# Altium PCB OBCComms.PcbDoc
Units mil, origin at the board's own origin, x right, y up, seen from the top; angles counter-clockwise.
Board outline 3625 x 3400 mil, 2 copper layers (Component Side, Bottom Layer), stack 65.756 mil thick; 25 components, 28 nets, 205 pads, 13 vias.
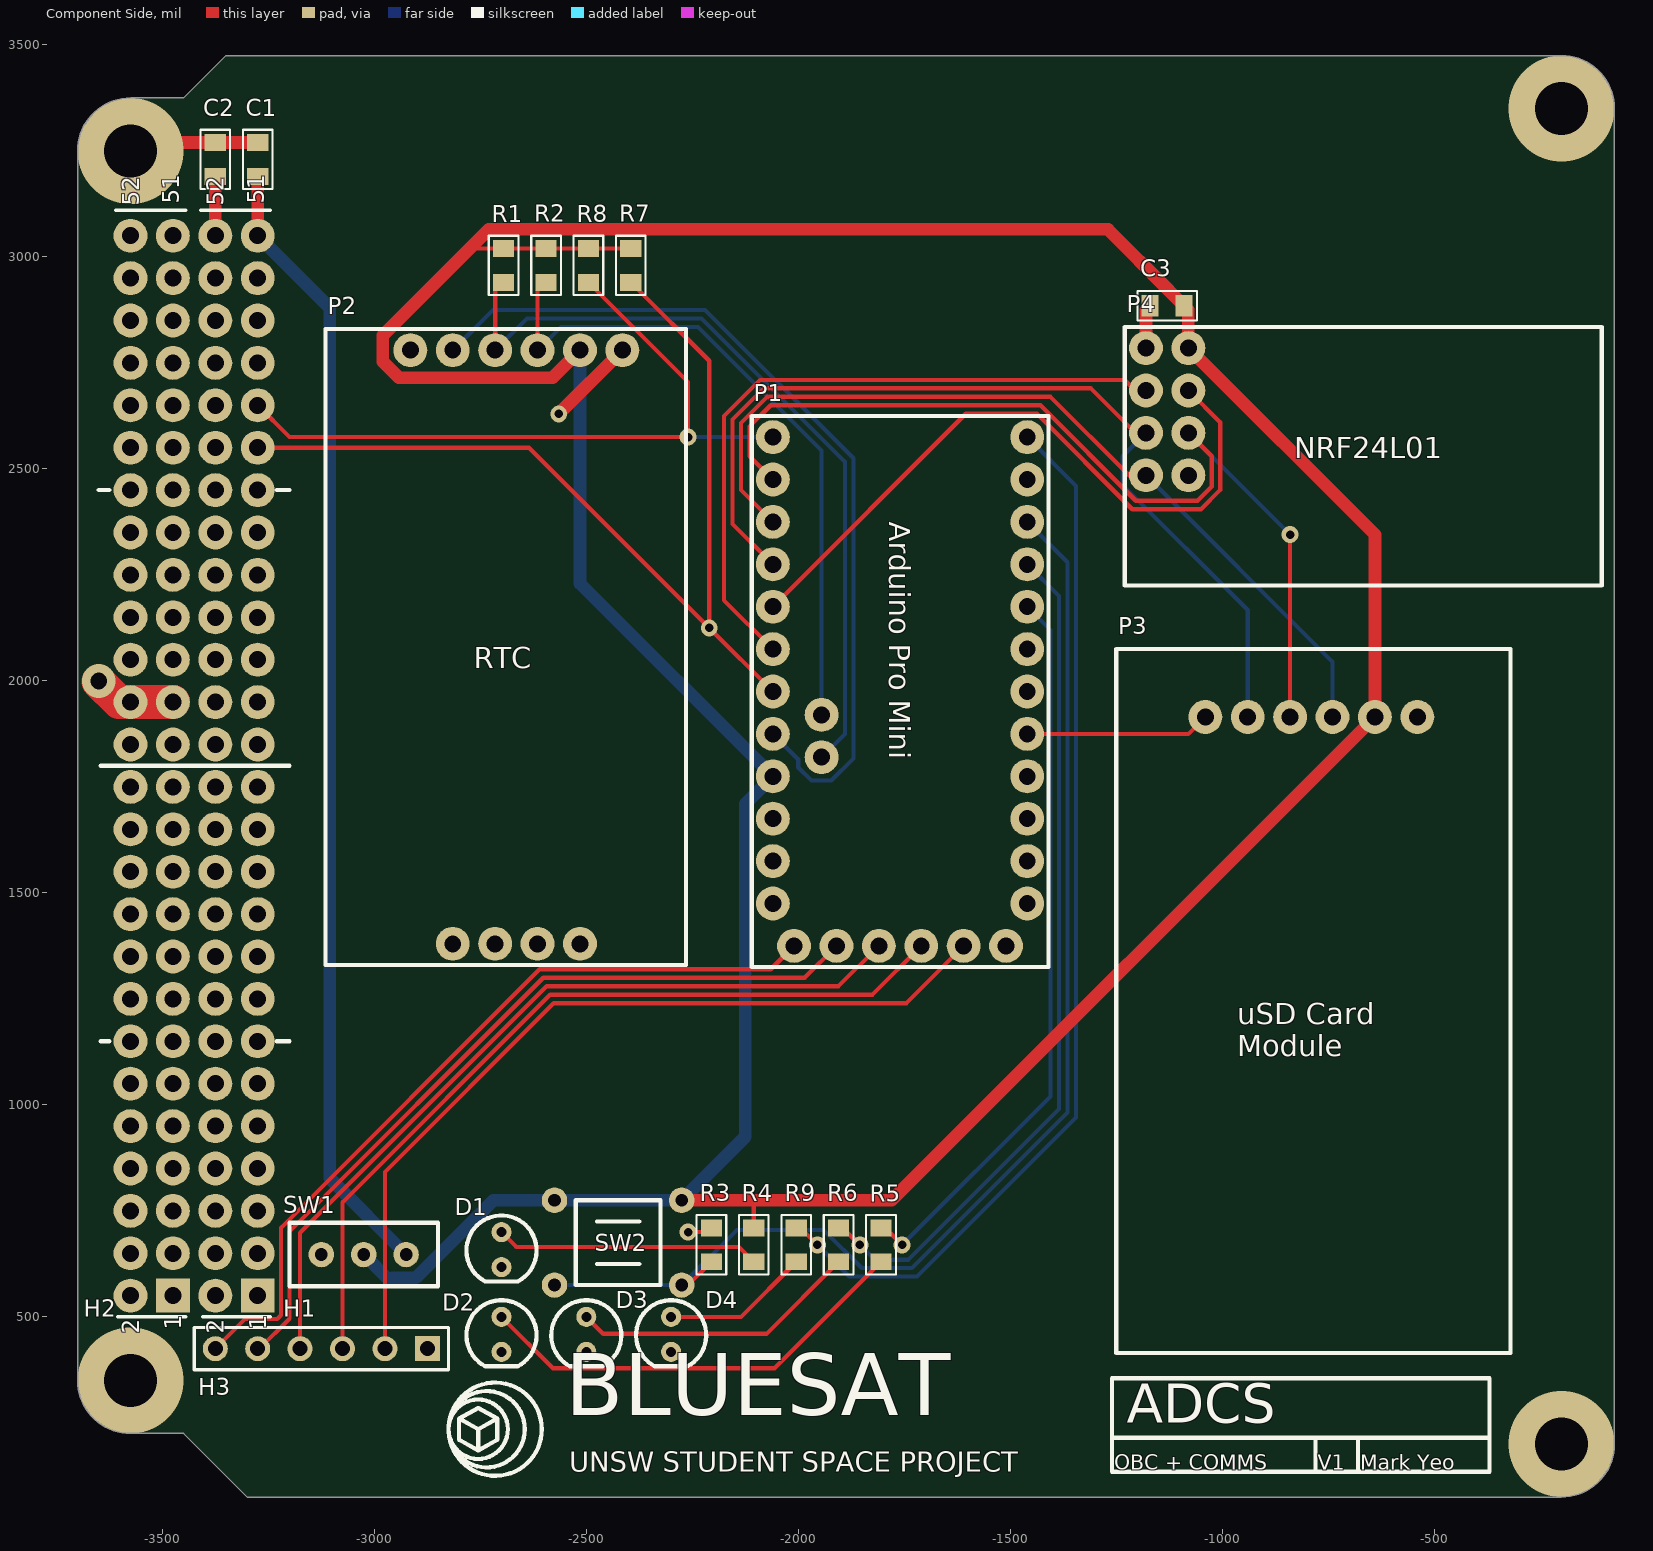
[diagram p0: Component Side view]
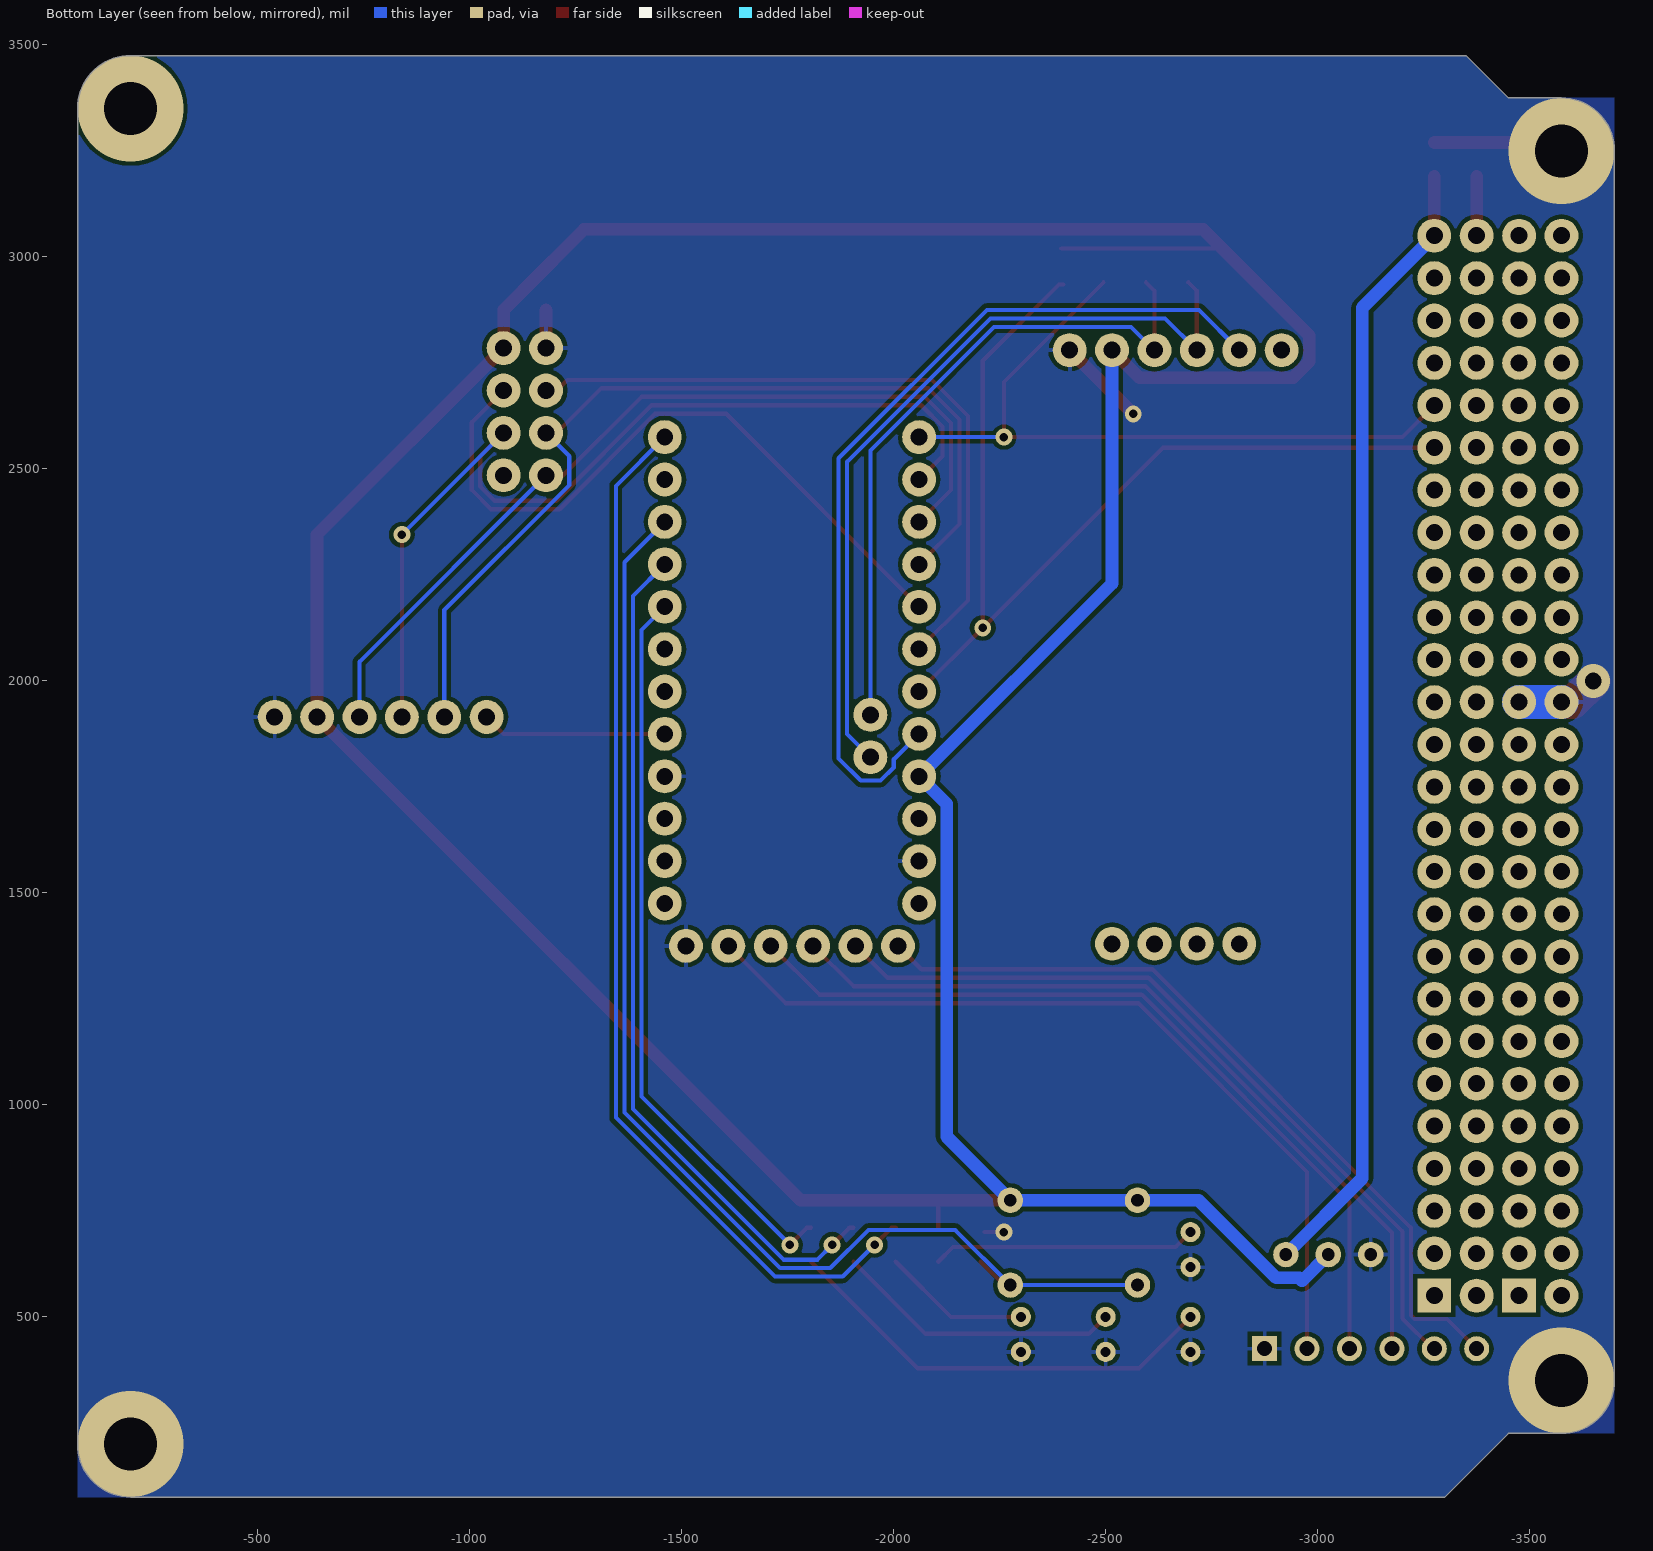
[diagram p1: Bottom Layer view, seen from below]

## Layer stack, top to bottom
Top Solder: solder mask 0.394, Solder Resist, Dk 3.5
Component Side: signal copper 1.378
Dielectric 1: core 63, FR-4, Dk 4.2
Bottom Layer: signal copper 1.378
Solder Side: solder mask 0.394, Solder Resist, Dk 3.5

## Board outline
-3575,225 cw(c-3575,350) -3700,350 -3700,3250 cw(c-3575,3250) -3575,3375 -3450,3375 -3350,3475 -200,3475 cw(c-200,3350) -75,3350 -75,200 cw(c-200,200) -200,75 -3300,75 -3450,225

## Design rules (kind name [scope] priority, off if disabled: settings)
Clearance [All] p1: gap=10
Clearance "Clearance (Same Net)" [All] p2: gap=0 except(8: SMDPad-SMDPad SMDPad-THPad SMDPad-Via)
ComponentClearance [All] p1: gap=0 collisioncheckmode=3 verticalgap=0 showdistances=FALSE
HoleSize HoleSize_1 [All] p1: absolutevalues=TRUE maxlimit=100000 minlimit=24 maxpercent=80.000 minpercent=20.000
HoleSize [All] p2: absolutevalues=TRUE maxlimit=100 minlimit=1 maxpercent=80.000 minpercent=20.000
HoleToHoleClearance mdViaViaSameLayer [All] p1: gap=8 allowstackedmicrovias=TRUE
HoleToHoleClearance [All] p2: gap=10 allowstackedmicrovias=TRUE
PasteMaskExpansion mlMinCreamFrame [All] p1: expansion=0
PasteMaskExpansion [All] p2: expansion=0
PlaneConnect PlaneConnect_1 [All] p1: planeconnectstyle=Relief reliefexpansion=20 reliefentries=4 reliefconductorwidth=10 reliefairgap=10
PlaneConnect PlaneConnect_2 [IsVia AND InNet('GND')] p2: planeconnectstyle=Direct reliefexpansion=20 reliefentries=4 reliefconductorwidth=10 reliefairgap=10
PolygonConnect ThermalVias [IsVia] p1: connectstyle=Direct reliefconductorwidth=10 reliefentries=4 polygonreliefangle="90 Angle" airgapwidth=10
PolygonConnect [All] p2: connectstyle=Relief reliefconductorwidth=10 reliefentries=4 polygonreliefangle="90 Angle" airgapwidth=10
RoutingVias [All] p1: holewidth=28 width=50 viastyle="Through Hole" minholewidth=28 minwidth=50 maxholewidth=28 maxwidth=50
SilkToSilkClearance [All] p1 off: silktosilkclearance=10
SilkToSolderMaskClearance [IsPad] p1 off: minsilkscreentomaskgap=10 clearancetoexposedcopper=TRUE
SolderMaskExpansion mlMinStopFrame [All] p1: expansion=4
SolderMaskExpansion [All] p2: expansion=4
Width Width_1 [All] p1: maxlimit=100000 minlimit=6 preferedwidth=10
Width [All] p2: maxlimit=10 minlimit=8 preferedwidth=10
23 further rules are at their usual default settings.

## Components (designator, comment, footprint, x,y, rotation, side; value= is the part's Value field where it differs from the comment)
C1 "100nF" 0805C-TBD -3275,3200 r90 top
C2 "100nF" 0805C-TBD -3375,3200 r90 top
C3 "10uF" 0805C-GENERIC -1160,2885 r0 top
D1 "LED" LED -2700,700 r0 top
D2 "LED" LED -2700,500 r0 top
D3 "LED" LED -2500,500 r0 top
D4 "LED" LED -2300,500 r0 top
H1 "26X2 Header" "26X2 Header" -3275,550 r90 top
H2 "26X2 Header" "26X2 Header" -3475,550 r90 top
H3 "Header 6" HDR1X6 -2875,425 r180 top
P1 "Arduino Pro Mini" "Arduino Pro Mini" -1460,1475 r180 top
P2 "DS3231" RTC -2915,2780 r90 top
P3 "uSD Card Module" "uSD Card Module" -1040,1915 r90 top
P4 "NRF24L01" NRF24L01 -1180,2785 r0 top
R1 "4K7" 0805R-4K7 -2695,3010 r270 top
R2 "4K7" 0805R-4K7 -2595,3010 r270 top
R3 "4K7" 0805R-4K7 -2205,640 r90 top
R4 "150R" 0805R-150 -2105,700 r270 top
R5 "150R" 0805R-150 -1805,700 r270 top
R6 "150R" 0805R-150 -1905,700 r270 top
R7 "4K7" 0805R-4K7 -2395,3010 r270 top
R8 "4K7" 0805R-4K7 -2495,3010 r270 top
R9 "150R" 0805R-150 -2005,700 r270 top
SW1 "ToggleSwitch" SWITCHFOOTPRINT -2925,647 r90 top
SW2 "PushButton" PushButton -2575,575 r0 top

## Footprints (in the part's own frame and the unit in brackets; to place one, negate y for a bottom-side part, rotate by r counter-clockwise, add the part's x,y. Pads: shape width x height; smd on the part's side, far side on the other; paste and mask are expansions set on the pad)
"26X2 Header" [mil]
  rect 80x80 hole 40: 1(0,0)
  round 80 hole 40: 2(0,100) 3(100,0) 4(100,100) 5(200,0) 6(200,100) 7(300,0) 8(300,100) 9(400,0) 10(400,100) 11(500,0) 12(500,100) 13(600,0) 14(600,100) 15(700,0) 16(700,100) 17(800,0) 18(800,100) 19(900,0) 20(900,100) 21(1000,0) 22(1000,100) 23(1100,0) 24(1100,100) 25(1200,0) 26(1200,100) 27(1300,0) 28(1300,100) 29(1400,0) 30(1400,100) 31(1500,0) 32(1500,100) 33(1600,0) 34(1600,100) 35(1700,0) 36(1700,100) 37(1800,0) 38(1800,100) 39(1900,0) 40(1900,100) 41(2000,0) 42(2000,100) 43(2100,0) 44(2100,100) 45(2200,0) 46(2200,100) 47(2300,0) 48(2300,100) 49(2400,0) 50(2400,100) 51(2500,0) 52(2500,100)
  silkscreen extent -50,-30 2560,135, body extent -55,-47 2555,150, height 335
0805C-GENERIC [mil] "CAPACITOR 0805"
  rect 40x50 smd: 1(-10,0) 2(70,0)
  silkscreen extent -40,-35 100,35, body extent -11,-25 70,25, height 26
0805C-TBD [mil] "CAPACITOR 0805"
  rect 40x50 smd: 1(-10,0) 2(70,0)
  silkscreen extent -40,-35 100,35, body extent -11,-25 70,25, height 26
0805R-4K7 [mil] "RESISTOR 0805"
  rect 40x50 smd: 1(-10,0) 2(70,0)
  silkscreen extent -40,-35 100,35, body extent -11,-25 70,25, height 27
0805R-150 [mil] "RESISTOR 0805"
  rect 40x50 smd: 1(-10,0) 2(70,0)
  silkscreen extent -40,-35 100,35, body extent -11,-25 70,25, height 27
"Arduino Pro Mini" [mil]
  round 80 hole 40: 1(0,0) 2(0,-100) 3(0,-200) 4(0,-300) 5(0,-400) 6(0,-500) 7(0,-600) 8(0,-700) 9(0,-800) 10(0,-900) 11(0,-1000) 12(0,-1100) 13(600,0) 14(600,-100) 15(600,-200) 16(600,-300) 17(600,-400) 18(600,-500) 19(600,-600) 20(600,-700) 21(600,-800) 22(600,-900) 23(600,-1000) 24(600,-1100) 25(485,-345) 26(485,-445) 27(50,100) 28(150,100) 29(250,100) 30(350,100) 31(450,100) 32(550,100)
  silkscreen extent -50,-1150 650,150
HDR1X6 [mm] "Connector; Header; 6 Position"
  rect 1.5x1.5 hole 0.9: 1(0,0)
  round 1.5 hole 0.9: 2(2.54,0) 3(5.08,0) 4(7.62,0) 5(10.16,0) 6(12.7,0)
  silkscreen extent -1.27,-1.27 13.97,1.27
LED [mm]
  round 1.2 hole 0.6: 1(0,0) 2(0,-2.1)
  silkscreen extent -2.1,-2.96 2.1,1
NRF24L01 [mil]
  round 80 hole 40: 1(0,0) 2(0,-100) 3(0,-200) 4(0,-300) 5(100,-300) 6(100,-200) 7(100,-100) 8(100,0)
  silkscreen extent -50,-560 1075,50
PushButton [mil]
  round 60 hole 30: 5(0,0) 6(300,0) 7(0,200) 8(300,200)
  silkscreen extent 50,0 250,200, body extent 50,0 250,200, height 300
RTC [mil]
  round 80 hole 40: 1(0,0) 2(0,-100) 3(0,-200) 4(0,-300) 5(0,-400) 6(0,-500) 7(-1400,-100) 8(-1400,-200) 9(-1400,-300) 10(-1400,-400)
  silkscreen extent -1450,-650 50,200
SWITCHFOOTPRINT [mil]
  round 60 hole 30: 2(0,0) 3(0,100) 4(0,200)
  silkscreen extent -75,-75 75,275, body extent -75,-75 75,275, height 300
"uSD Card Module" [mil]
  round 80 hole 40: 1(0,0) 2(0,-100) 3(0,-200) 4(0,-300) 5(0,-400) 6(0,-500)
  silkscreen extent -1500,-720 160,210

## Part data
C1 C2: library part 0805C-100nF-25V-X7R-MUR, "CAPACITOR 0805 CERAMIC"
C3: library part 0805C-10UF-16V-X5R-TDK, "CAPACITOR 0805 CERAMIC"
D1 D2 D3 D4: "Small LED"
H3: "Header, 6-Pin"
P2: "RTC"
P4: "Radio Transceiver"
R1 R2 R3 R7 R8: library part 0805R-4K7, "RESISTOR 0805 1/4 WATT THIN FILM"
R4 R5 R6 R9: library part 0805R-150, "RESISTOR 0805 1/4 WATT THIN FILM"

## Via types
v1: diameter 40, hole 20, Component Side to Bottom Layer, 8 vias
v2: diameter 250, hole 125, Component Side to Bottom Layer, 4 vias
v3: diameter 80, hole 40, Component Side to Bottom Layer, 1 vias

## Nets (pads, with @x,y where several pads share a name; then routed paths per layer and width w, separated by ;. In a path a pad name is that pad's centre, name@x,y a point inside that pad or via, vN(x,y) a via of type N, cw(c..) or ccw(c..) an arc to the next point about the centre after c; other vN are vias at no path point)
3V3_IN: C2.1 H1.52 | length 140
  Component Side w30: H1.52 C2.1
5V_IN: C1.1 H1.51 SW1.2 | length 2688
  Component Side w30: H1.51 C1.1
  Bottom Layer w30: H1.51 -3105,2880 -3105,827 SW1.2
CE_NRF: P1.19 P4.2 | length 1620.3
  Component Side w10: P1.19 -2175,2190 -2175,2625 -2090,2710 -1230,2710 P4.2@-1200,2680
CS_NRF: P1.20 P4.7 | length 1621.4
  Component Side w10: P1.20 -1605,2630 -1437.22,2630 -1212.22,2405 -1050,2405 -1005,2450 -1005,2610 P4.7
CSUSD: P1.5 P3.1 | length 436.6
  Component Side w10: P1.5 -1080,1875 P3.1
EXTCLK: P1.17 P2.2 | length 2124.4
  Bottom Layer w10: P2.2 -2720,2875 -2220,2875 -1870,2525 -1870,1817.22 -1922.22,1765 -1969,1765 -2000,1796 -2000,1815 P1.17 P1.17@-2060,1856
GND: C1.2 C2.2 C3.1 D1.2 D2.2 D3.2 D4.2 H2.29 H2.30 H3.1 P1.4 P1.14 P1.27 P2.6 P3.6 P4.1 R3.2 SW1.4 | length 923.5
  Component Side w10: v1(-2260,700) R3.2@-2215,700
  Component Side w30: v2@-3555,3270 C2.2 C1.2 ; v1(-2565,2630) P2.6 ; P4.1 C3.1@-1180,2875
  Component Side w80: v3@-3651.14,1998.86 -3602.28,1950 H2.30 H2.29
  Bottom Layer w80: H2.30 H2.29
  other v2: -200,200 -3575,350 -3575,3250
  other v3: -3650,2000
LED_B: P1.12 R9.1 | length 2515.6
  Component Side w10: R9.1 -1995,710 v1(-1955,670)
  Bottom Layer w10: v1(-1955,670) -1880,595 -1720,595 -1345,970 -1345,2460 P1.12
LED_G: P1.9 R6.1 | length 2013.9
  Component Side w10: R6.1 -1895,710 v1(-1855,670)
  Bottom Layer w10: v1(-1855,670) -1820,635 -1740.5,635 -1385,990.5 -1385,2200 P1.9
LED_Y: P1.8 R5.1 | length 1739.3
  Component Side w10: R5.1 -1795,710 v1(-1755,670)
  Bottom Layer w10: v1(-1755,670) -1405,1020 -1405,2120 P1.8
MISO: P1.22 P3.4 P4.4 | length 2033.9
  Component Side w10: P1.22 -2135,2450 -2135,2608.43 -2073.43,2670 -1405,2670 P4.4@-1220,2485
  Bottom Layer w10: P4.4 -740,2045 P3.4
MOSI: P1.23 P3.3 P4.6 | length 2284.5
  Component Side w10: P1.23 -2115,2530 -2115,2600.15 -2065.15,2650 -1428.93,2650 -1203.93,2425 -1058.28,2425 -1025,2458.28 -1025,2530 P4.6 ; P3.3 v1(-840,2345)
  Bottom Layer w10: P4.6 v1(-840,2345)
NetD1_1: D1.1 R4.2 | length 624
  Component Side w10: D1.1 -2665,665 -2140,665 R4.2
NetD2_1: D2.1 R5.2 | length 1049.3
  Component Side w10: D2.1 -2578.7,378.7 -2056.3,378.7 R5.2
NetD3_1: D3.1 R6.2 | length 682
  Component Side w10: D3.1 -2460,460 -2075,460 R6.2
NetD4_1: D4.1 R9.2 | length 348.8
  Component Side w10: D4.1 -2135,500 R9.2
NetH3_2: H3.2 P1.28 | length 2002.7
  Component Side w10: H3.2 -2975,841.86 -2576.86,1240 -1745,1240 P1.28
NetH3_3: H3.3 P1.29 | length 1960.7
  Component Side w10: H3.3 -3075,770.15 -2585.15,1260 -1825,1260 P1.29
NetH3_4: H3.4 P1.30 | length 1918.7
  Component Side w10: H3.4 -3175,698.43 -2593.43,1280 -1905,1280 P1.30
NetH3_5: H3.5 P1.31 | length 1879.3
  Component Side w10: H3.5 -3270.5,425 -3200,495.5 -3200,701.72 -2601.72,1300 -1985,1300 P1.31
NetH3_6: H3.6 P1.32 | length 1879.3
  Component Side w10: H3.6 -3305,495 -3228.79,495 -3220,503.79 -3220,710 -2610,1320 -2065,1320 P1.32
PUSH_BUTTON: P1.10 R3.1 SW2.5 SW2.6 | length 2978.1
  Component Side w10: SW2.6 -2260,575 R3.1
  Bottom Layer w10: SW2.5 SW2.6 -2145,705 -1940.5,705 -1850.5,615 -1732.22,615 -1365,982.22 -1365,2280 P1.10
SCK: P1.21 P3.2 P4.3 | length 2227
  Component Side w10: P1.21 -2155,2370 -2155,2616.72 -2081.72,2690 -1310,2690 P4.3@-1200,2580
  Bottom Layer w10: P4.3 -1235,2530 -1235,2462.22 -940,2167.22 P3.2
SCL: P1.25 P2.3 R1.2 | length 1884
  Component Side w10: P2.3 -2715,2920 R1.2
  Bottom Layer w10: P2.3 -2640,2855 -2228.28,2855 -1890,2516.72 -1890,1875 P1.25
SCL_EXT: H1.43 P1.24 R8.2 | length 1708.4
  Component Side w10: H1.43 -3200,2575 v1(-2260,2575) -2260,2705 R8.2
  Bottom Layer w10: v1(-2260,2575) P1.24
SDA: P1.26 P2.4 R2.2 | length 1605.3
  Component Side w10: P2.4 -2615,2920 R2.2
  Bottom Layer w10: P2.4 -2560,2835 -2236.57,2835 -1945,2543.43 P1.26
SDA_EXT: H1.41 P1.18 R7.2 | length 2347.7
  Component Side w10: H1.41 -2635,2550 v1(-2210,2125) ; R7.2@-2400,2935 -2390,2935 -2210,2755 v1(-2210,2125) ; P1.18 v1(-2210,2125)
VCC: C3.2 P1.16 P2.5 P3.5 P4.8 R1.1 R2.1 R4.1 R7.1 R8.1 SW1.3 SW2.7 SW2.8 | length 9478.1
  Component Side w10: -2780,3020 R1.1 R2.1 R8.1 R7.1 ; R4.1 -2105,775
  Component Side w30: P2.5 -2580,2715 -2941.92,2715 -2980,2753.08 -2980,2815 -2730,3065 -1269.64,3065 -1125,2920.36 -1125,2920 C3.2 -1080,2875 P4.8 ; SW2.8 -2105,775 -1780,775 -660,1895 P3.5@-660,1920 ; P4.8@-1075,2780 -640,2345 P3.5
  Bottom Layer w30: SW1.3 -2963,585 -2956,592 -2902.22,592 -2719.22,775 SW2.7 SW2.8 -2125,925 -2125,1710 P1.16 -2515,2230 P2.5
pads on no net: H1.1 H1.2 H1.3 H1.4 H1.5 H1.6 H1.7 H1.8 H1.9 H1.10 H1.11 H1.12 H1.13 H1.14 H1.15 H1.16 H1.17 H1.18 H1.19 H1.20 H1.21 H1.22 H1.23 H1.24 H1.25 H1.26 H1.27 H1.28 H1.29 H1.30 H1.31 H1.32 H1.33 H1.34 H1.35 H1.36 H1.37 H1.38 H1.39 H1.40 H1.42 H1.44 H1.45 H1.46 H1.47 H1.48 H1.49 H1.50 H2.1 H2.2 H2.3 H2.4 H2.5 H2.6 H2.7 H2.8 H2.9 H2.10 H2.11 H2.12 H2.13 H2.14 H2.15 H2.16 H2.17 H2.18 H2.19 H2.20 H2.21 H2.22 H2.23 H2.24 H2.25 H2.26 H2.27 H2.28 H2.31 H2.32 H2.33 H2.34 H2.35 H2.36 H2.37 H2.38 H2.39 H2.40 H2.41 H2.42 H2.43 H2.44 H2.45 H2.46 H2.47 H2.48 H2.49 H2.50 H2.51 H2.52 P1.1 P1.2 P1.3 P1.6 P1.7 P1.11 P1.13 P1.15 P2.1 P2.7 P2.8 P2.9 P2.10 P4.5
copper on no net:
  other v2: -200,3350

## Polygon pours and split planes (outlines as drawn)
GND on Bottom Layer "Bottom Layer-GND" (solid, pour order 6): -75,75 -75,3475 -3350,3475 -3450,3375 -3700,3375 -3700,225 -3450,225 -3300,75 -75,75

## Silkscreen, mask and mechanical layers (free items; w line width, h text height)
Top Overlay:
  circle w10: c-2755,235 r70
  circle w10: c-2735,235 r90
  circle w10: c-2715,235 r110
  lines w10: -3650,2450 -3625,2450 ; -3645,1150 -3625,1150 ; -3645,1800 -3200,1800 ; -3230,1150 -3200,1150 ; -3230,2450 -3200,2450 ; -1260,215 -370,215 ; -780,135 -780,215 ; -680,135 -680,215 ; -2800,260 -2755,235 ; -2800,260 -2800,210 -2755,185 ; -2800,260 -2755,285 -2710,260 ; -2755,185 -2755,235 ; -2755,185 -2710,210 -2710,260 ; -2755,235 -2710,260 ; -1260,135 -1260,355 -370,355 -370,135 -1260,135
  text "BLUESAT" at -2550,220 h250
  text "ADCS" at -1225,220 h157.48
  text "OBC + COMMS" at -1255,140 h35
  text "V1" at -775,140 h35
  text "Mark Yeo" at -675,140 h35
  text "UNSW STUDENT SPACE PROJECT" at -2540,135 h47.24
Mechanical 13:
  lines w10: -3700,350 ccw(c-3575,350) -3575,225 -3500,225 -3450,225 -3300,75 -200,75 ccw(c-200,200) -75,200 -75,3350 ccw(c-200,3350) -200,3475 -3350,3475 -3450,3375 -3500,3375 -3575,3375 ccw(c-3575,3250) -3700,3250 -3700,350

## Text inside footprints (layer, text, board x,y; h text height)
H1: Top Overlay "52" at -3355,3120.16 h40 r90; Top Overlay "51" at -3260,3125.16 h40 r90; Top Overlay "1" at -3255,470.16 h40 r90; Top Overlay "2" at -3355,460.16 h40 r90
H2: Top Overlay "52" at -3555,3120.16 h40 r90; Top Overlay "51" at -3460,3125.16 h40 r90; Top Overlay "1" at -3455,470.16 h40 r90; Top Overlay "2" at -3555,460.16 h40 r90
P2: Top Overlay "RTC" at -2765,2030 h50
P3: Top Overlay "uSD Card / Module" at -965,1115 h50